# Altium PCB Copy of Final b.PcbDoc
Units mil, origin at the board's own origin, x right, y up, seen from the top; angles counter-clockwise.
Board outline 1791.34 x 1673.23 mil, 2 copper layers (Top Layer, Bottom Layer); 55 components, 36 nets, 187 pads, 190 vias.
Unrouted connection lines stored in the file: 61.
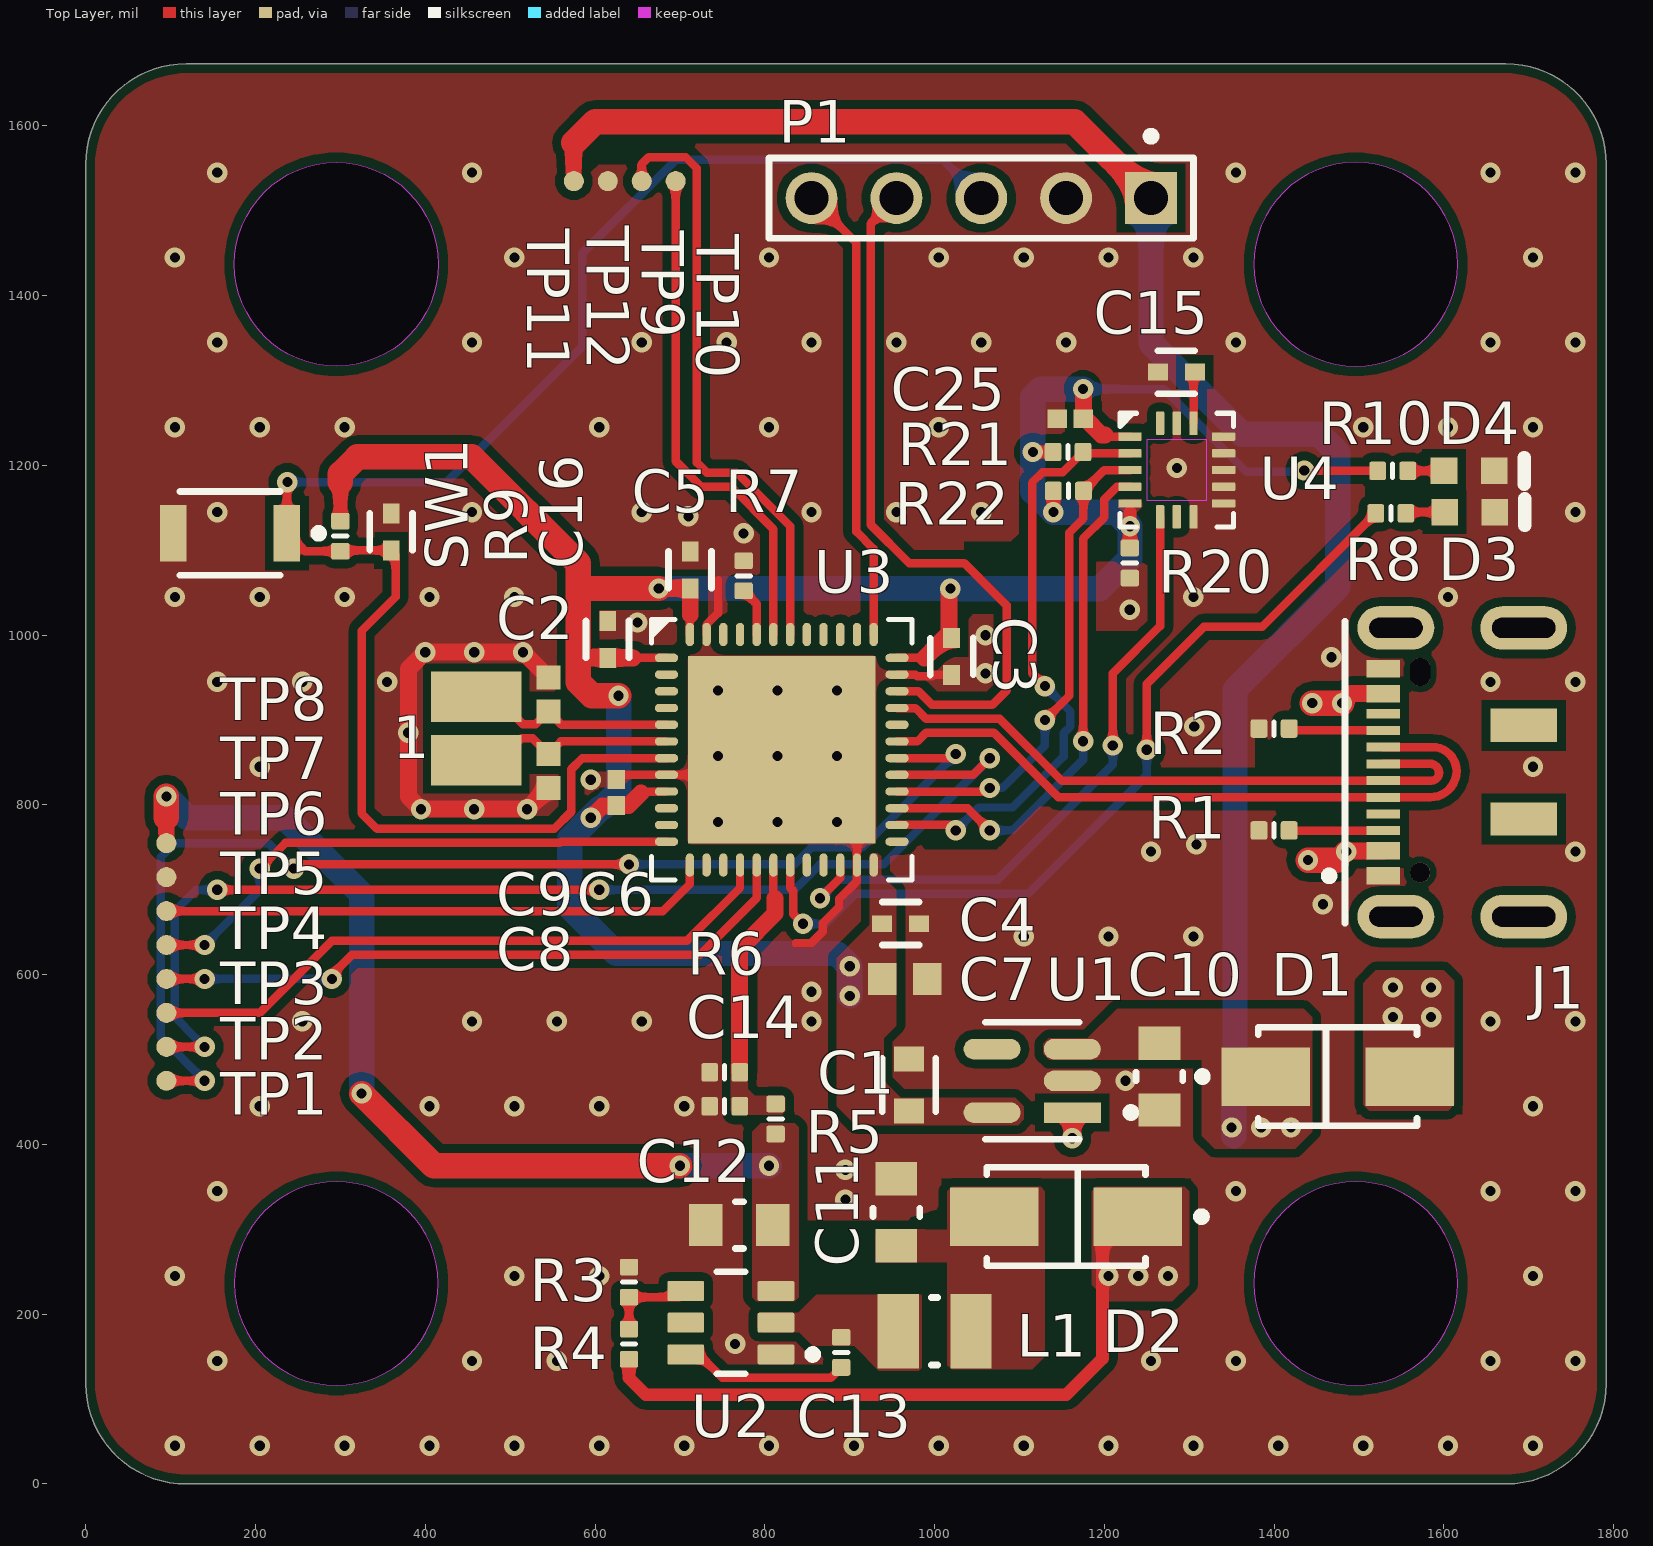
[diagram p0: Top Layer view]
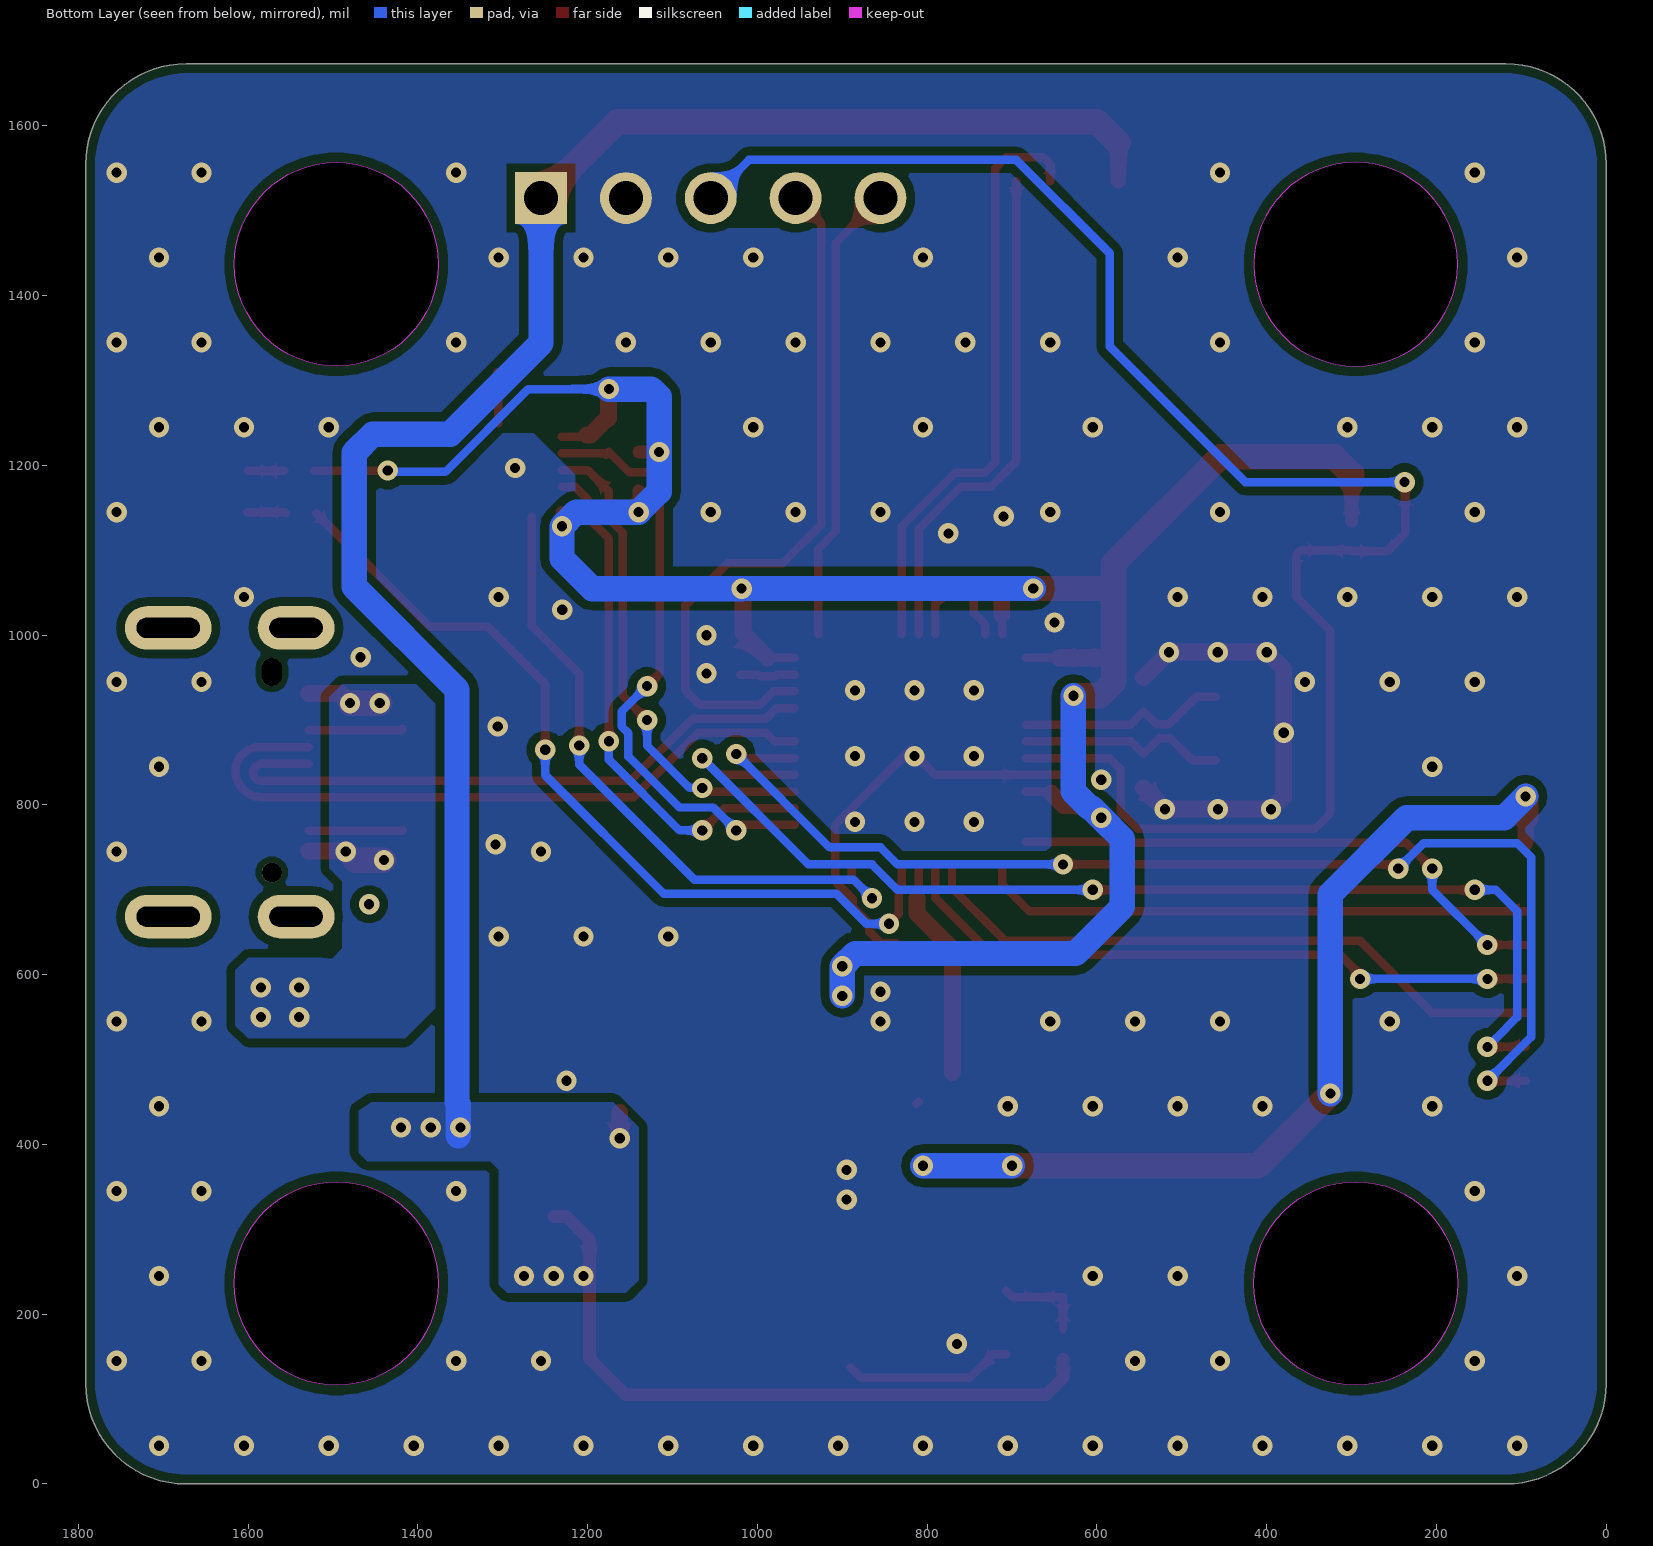
[diagram p1: Bottom Layer view, seen from below]

## Layer stack, top to bottom
Top Solder: solder mask 0.4, Solder Resist, Dk 3.5
Top Layer: signal copper 1.4
Dielectric 1: dielectric 12.6, FR-4, Dk 4.8
Bottom Layer: signal copper 1.4
Bottom Solder: solder mask 0.4, Solder Resist, Dk 3.5

## Board outline
0,118.11 ccw(c118.11,118.11) 118.11,0 1673.23,0 ccw(c1673.23,118.11) 1791.34,118.11 1791.34,1555.12 ccw(c1673.23,1555.12) 1673.23,1673.23 118.11,1673.23 ccw(c118.11,1555.12) 0,1555.12
cut-out: 1375.98,236.22 ccw(c1496.06,236.22) 1496.06,116.14 ccw(c1496.06,236.22) 1616.14,236.22 ccw(c1496.06,236.22) 1496.06,356.3 ccw(c1496.06,236.22)
cut-out: 1375.98,1437.01 ccw(c1496.06,1437.01) 1496.06,1316.93 ccw(c1496.06,1437.01) 1616.14,1437.01 ccw(c1496.06,1437.01) 1496.06,1557.09 ccw(c1496.06,1437.01)
cut-out: 295.28,1316.93 cw(c295.28,1437.01) 175.2,1437.01 cw(c295.28,1437.01) 295.28,1557.09 cw(c295.28,1437.01) 415.35,1437.01 cw(c295.28,1437.01)
cut-out: 175.2,236.22 ccw(c295.28,236.22) 295.28,116.14 ccw(c295.28,236.22) 415.35,236.22 ccw(c295.28,236.22) 295.28,356.3 ccw(c295.28,236.22)

## Design rules (kind name [scope] priority, off if disabled: settings)
BoardOutlineClearance [All] p1: gap=11.18 ignorepadtopadclearanceinfootprint=FALSE
Clearance MCU_ROOM [WithinRoom('ELRS_ROOM')OR WithinRoom('Motor_room')] p1: gap=10 ignorepadtopadclearanceinfootprint=FALSE except(0: Arc-SMDPad Arc-Text Track-SMDPad Track-Text SMDPad-SMDPad SMDPad-Text THPad-Text Via-Text Fill-Text Poly-Text Region-Text Text-Text; 6.5: Arc-Arc Arc-Track Track-Track)
Clearance [All] p2: gap=10 ignorepadtopadclearanceinfootprint=FALSE except(0: Arc-Text Track-Text SMDPad-Text THPad-Text Via-Text Fill-Text Poly-Text Region-Text Text-Text; 6: Arc-SMDPad Arc-THPad Arc-Via Track-SMDPad Track-THPad Track-Via SMDPad-SMDPad SMDPad-THPad SMDPad-Via THPad-THPad THPad-Via Via-Via; 6.5: Arc-Arc Arc-Track Track-Track; 6.9: Arc-Hole Track-Hole SMDPad-Hole THPad-Hole Via-Hole Fill-Hole Poly-Hole Region-Hole Text-Hole)
PlaneConnect [All] p1: planeconnectstyle=Direct reliefexpansion=20 reliefentries=4 reliefconductorwidth=10 reliefairgap=10
PolygonConnect [All] p1: connectstyle=Direct reliefconductorwidth=10 reliefentries=4 polygonreliefangle="90 Angle" airgapwidth=10
RoutingVias [All] p1: holewidth=12 width=24 viastyle="Through Hole" minholewidth=12 minwidth=24 maxholewidth=12 maxwidth=24
SolderMaskExpansion [IsVia] p1: expansion=0 istentingtop=TRUE
SolderMaskExpansion SolderMaskExpansion_1 [All] p2: expansion=4 istentingtop=FALSE
SupplyNets "Schematic Supply Nets_3" [InNet('6S LIPO VBAT')] p1: voltage=0.000
SupplyNets "Schematic Supply Nets_2" [InNet('+5')] p2: voltage=0.000
SupplyNets "Schematic Supply Nets_1" [InNet('+3.3')] p3: voltage=0.000
SupplyNets "Schematic Supply Nets" [InNet('GND')] p4: voltage=0.000
UnRoutedNet [All] p1: checkbadconnections=TRUE
Width [All] p1: maxlimit=30 minlimit=10 preferedwidth=10
28 further rules are at their usual default settings.

## Classes and differential pairs
component class "Copy of Final": 1 C1 C2 C3 C4 C5 C6 C7 C8 C9 C10 C11 C12 C13 C14 C15 C16 C25 D1 D2 D3 D4 J1 P1 R1 R4 R5 R6 R7 R8 R9 R10 R20 R21 R22 SW1 TP1 TP2 TP3 TP4 TP5 TP6 TP7 TP8 TP9 TP10 TP11 TP12 U1 U2 U3 U4

## Components (designator, comment, footprint, x,y, rotation, side; value= is the part's Value field where it differs from the comment)
1 "NX3225GD-8MHZ-STD-CRA-3" NDK-NX3225GD-8MHZ-STD-CRA-3_V 460,890.08 r270 top
C1 "4.7uF" FP-GRM188-0_15-MFG 970,470 r90 top
C2 "100nF" FP-0402YC104KAT2A-MFG 615,995 r90 top
C3 "100nF" FP-0402YC104KAT2A-MFG 1020,975 r270 top
C4 "100nF" FP-0402YC104KAT2A-MFG 960,660 r0 top
C5 "100nF" FP-0402YC104KAT2A-MFG 712.17,1076.89 r90 top
C6 "10nF" CAPC1005X55X25LL05T10 625,814.65 r90 top
C7 "1uF" CAPC1608X90X35NL10T15 965,595 r180 top
C8 "Capacitor 10 pF +/- 5% 50 V 0402" CAPC1005X55X25ML05T05 545,840.08 r270 top value=10pF
C9 "Capacitor 10 pF +/- 5% 50 V 0402" CAPC1005X55X25ML05T05 545,930.08 r90 top value=10pF
C10 "10µF" FP-0805-L_2_0_0_15-W_1_25-MFG 1265,480 r270 top
C11 "10µF" FP-0805-L_2_0_0_15-W_1_25-MFG 955,320 r270 top
C12 "10µF" FP-0805-L_2_0_0_15-W_1_25-MFG 770,305 r180 top
C13 "Capacitor 100nF +/-20% 50V 0402" CAPC0402(1005)60_L 890,155 r270 top value=100nF
C14 "Capacitor 100nF +/-20% 50V 0402" CAPC0402(1005)60_L 752.72,445 r180 top value=100nF
C15 "100nF" FP-0402YC104KAT2A-MFG 1285,1310 r180 top
C16 "100nF" FP-0402YC104KAT2A-MFG 360,1121.65 r90 top
C25 "Capacitor 0.1 uF +/- 5% 16 V 0402" CAPC1005X56X25LL10T15 1160,1255 r180 top value=100nF
D1 "SS14" FP-403AE-MFG 1475,480 r180 top
D2 "SS14" FP-403AE-MFG 1155,315 r0 top
D3 "HSMR-C190" AVAG-HSMX-C190_V 1630.47,1145 r0 top
D4 "HSMR-C190" AVAG-HSMX-C190_V 1629.8,1193.62 r0 top
J1 "DX07S016JA3R1500" FP-DX07S016JA3R1500-MFG 1648.9,838.54 r90 top
L1 "MLP2520S100MT0S1 TDK" INDC2520X100X60NL20T20 1000,180 r0 top
P1 "77311-462K05LF" FCI-77311-5_V 1055,1515 r180 top
R1 "Resistor 2K37 +/-1 % 0402 63 mW" RESC0402(1005)_L 1400,770 r0 top value=5.1K
R2 "Resistor 2K37 +/-1 % 0402 63 mW" RESC0402(1005)_L 1400,890 r180 top value=5.1K
R3 "Resistor 2K37 +/-1 % 0402 63 mW" RESC0402(1005)_L 640,237.72 r90 top value=13..3K
R4 "100KR2F" RESC0402(1005)_L 640,164.68 r90 top
R5 "Resistor 2K37 +/-1 % 0402 63 mW" RESC0402(1005)_L 812.72,430 r270 top value=68K
R6 "Resistor 2K37 +/-1 % 0402 63 mW" RESC0402(1005)_L 752.72,485 r0 top value=10K
R7 "Resistor 2K37 +/-1 % 0402 63 mW" RESC0402(1005)_L 775,1070 r270 top value=10K
R8 "Resistor 2K37 +/-1 % 0402 63 mW" RESC0402(1005)_L 1537.56,1143.62 r0 top value=330
R9 "Resistor 2K37 +/-1 % 0402 63 mW" RESC0402(1005)_L 300,1116.65 r90 top value=10K
R10 "Resistor 2K37 +/-1 % 0402 63 mW" RESC0402(1005)_L 1539.8,1193.62 r0 top value=1K
R20 "Resistor 2K37 +/-1 % 0402 63 mW" RESC0402(1005)_L 1230,1085 r90 top value=10K
R21 "Resistor 2K37 +/-1 % 0402 63 mW" RESC0402(1005)_L 1157.21,1215.86 r0 top value=10K
R22 "Resistor 2K37 +/-1 % 0402 63 mW" RESC0402(1005)_L 1157.72,1170 r0 top value=10K
SW1 "B3U-1000P" OMRON-B3U-1000_V 170,1120 r180 top
TP1 "TPAD6R" TP06R 95,475 r180 top
TP2 "TPAD6R" TP06R 95,515 r180 top
TP3 "TPAD6R" TP06R 95,555 r180 top
TP4 "TPAD6R" TP06R 95,595 r180 top
TP5 "TPAD6R" TP06R 95,635 r180 top
TP6 "TPAD6R" TP06R 95,675 r180 top
TP7 "TPAD6R" TP06R 95,715 r180 top
TP8 "TPAD6R" TP06R 95,755 r180 top
TP9 "TPAD6R" TP06R 655,1535 r180 top
TP10 "TPAD6R" TP06R 695,1535 r180 top
TP11 "TPAD6R" TP06R 575,1535 r270 top
TP12 "TPAD6R" TP06R 615,1535 r270 top
U1 "AP2112K-3.3TRG1" FP-SOT25-IPC_A 1115,475 r180 top
U2 "TPS54302DDCR" FP-DDC0006A-MFG 760,190 r180 top
U3 "STM32L452CEU6" STM-UFQFPN48_N 820,865 r0 top
U4 "ICM-20602" INSE-I62-16 1285.43,1194.57 r0 top

## Footprints (in the part's own frame and the unit in brackets; to place one, negate y for a bottom-side part, rotate by r counter-clockwise, add the part's x,y. Pads: shape width x height; smd on the part's side, far side on the other; paste and mask are expansions set on the pad)
AVAG-HSMX-C190_V [mm] "SMD, 2-Leads, Body 1.6x0.8mm, Height 0.9mm"
  rect 0.8x0.8 smd: 1(-0.75,0) 2(0.75,0)
  silkscreen extent 1.65,-0.4 1.65,0.4, body extent -0.8,-0.4 0.8,0.4, height 0.9
CAPC0402(1005)60_L [mm] "Chip Capacitor, Body 1.0x0.5mm, Height 0.6mm, IPC High Density"
  rrect25% 0.5x0.55 smd: 1(-0.45,0) 2(0.45,0)
  silkscreen extent 0,-0.2 0,0.2, body extent -0.5,-0.25 0.5,0.25, height 0.6
CAPC1005X55X25LL05T10 [mm] "Chip Capacitor, 2-Leads, Body 1.05x0.55mm, IPC High Density"
  rect 0.56x0.52 smd: 1(-0.39,0) 2(0.39,0)
  body extent -0.53,-0.28 0.53,0.28, height 0.55
CAPC1005X55X25ML05T05 [mm] "Chip Capacitor, 2-Leads, Body 1.05x0.55mm, IPC Low Density"
  rect 0.72x0.72 smd: 1(-0.51,0) 2(0.51,0)
  body extent -0.53,-0.28 0.53,0.28, height 0.55
CAPC1005X56X25LL10T15 [mm] "Chip Capacitor, 2-Leads, Body 1.10x0.60mm, IPC High Density"
  rect 0.58x0.54 smd: 1(-0.39,0) 2(0.39,0)
  body extent -0.55,-0.3 0.55,0.3, height 0.56
CAPC1608X90X35NL10T15 [mm] "Chip Capacitor, 2-Leads, Body 1.60x0.80mm, IPC Medium Density"
  rect 0.85x0.95 smd: 1(-0.675,0) 2(0.675,0)
  body extent -0.85,-0.45 0.85,0.45, height 0.9
FCI-77311-5_V [mm] "THD, 5-Leads, Body 12.7x2.4mm, Pitch 2.54mm"
  rect 1.55x1.55 hole 1.02: 1(-5.08,0)
  round 1.55 hole 1.02: 2(-2.54,0) 3(0,0) 4(2.54,0) 5(5.08,0)
  silkscreen extent -6.35,-1.97 6.35,1.2, body extent -6.35,-1.2 6.35,1.2, height 16.24
FP-0402YC104KAT2A-MFG [mm]
  rect 0.6x0.5 smd paste+0 mask+0: 1(-0.55,0) 2(0.55,0)
  silkscreen extent -0.55,-0.64 0.56,0.65, body extent -0.95,-0.4 0.95,0.4, height 0.25
FP-403AE-MFG [mm]
  rect 2.65x1.75 smd paste+0 mask+0: 1(-2.15,0) 2(2.15,0)
  silkscreen extent -2.37,-1.48 4.17,1.48, body extent -3.57,-1.58 3.57,1.58, height 0.25
FP-0805-L_2_0_0_15-W_1_25-MFG [mm]
  rect 1x1.25 smd paste+0 mask+0: 1(-1,0) 2(1,0)
  silkscreen extent -0.13,-0.7 0.13,0.7, body extent -1.6,-0.8 1.6,0.8, height 0.25
FP-DDC0006A-MFG [mm]
  rrect17% 1.1x0.6 smd paste+0 mask+0: 1(-1.35,0.95) 2(-1.35,0) 3(-1.35,-0.95) 4(1.35,-0.95) 5(1.35,0) 6(1.35,0.95)
  silkscreen extent -2.58,-1.53 0.43,1.53, body extent -2,-1.63 2,1.63, height 0.25
FP-DX07S016JA3R1500-MFG [mm]
  rrect100% 1.3x2.3 hole 1.6 slot 0.6 at 0 deg paste-2539.97 mask+0: 1(-4.32,2.675) 2(4.32,2.675)
  rrect100% 1.3x2.6 hole 1.9 slot 0.6 at 0 deg paste-2539.97 mask+0: 3(-4.32,-1.15) 6(4.32,-1.15)
  rect 1x2 smd paste+0 mask+0: 4(-1.4,-1.15) 5(1.4,-1.15)
  rect 0.52x1 smd paste+0 mask+0: A1/B12(-3.1,3.05) A4/B9(-2.35,3.05) A12/B1(3.1,3.05) B4/A9(2.35,3.05)
  rect 0.27x1 smd paste+0 mask+0: A5(-1.75,3.05) A6(-0.25,3.05) A7(0.75,3.05) A8(1.75,3.05) B5(1.25,3.05) B6(0.25,3.05) B7(-0.75,3.05) B8(-1.25,3.05)
  round 0.6 hole 0.6 unplated paste-2539.97 mask+0: ""(-3,1.95)
  rrect100% 0.85x0.6 hole 0.6 slot 0.85 at 0 deg unplated paste-2539.97 mask+0: ""(3,1.95)
  silkscreen extent -4.52,4.2 4.52,4.8, body extent -5.07,-3.9 5.07,3.92, height 0.25
FP-GRM188-0_15-MFG [mm]
  rect 0.75x0.9 smd paste+0 mask+0: 1(-0.775,0) 2(0.775,0)
  silkscreen extent -0.8,-0.8 0.8,0.8, body extent -1.25,-0.58 1.25,0.58, height 0.25
FP-SOT25-IPC_A [mm]
  rect 1.707x0.616 smd paste+0 mask+0: 1(-1.201,0.95)
  rrect100% 1.707x0.616 smd paste+0 mask+0: 2(-1.201,0) 3(-1.201,-0.95) 4(1.201,-0.95) 5(1.201,0.95)
  silkscreen extent -3.08,-1.75 1.4,1.75, body extent -2.55,-2 2.55,2, height 0.25
INDC2520X100X60NL20T20 [mm] "Chip Inductor, 2-Leads, Body 2.7x2.2mm, IPC Medium Density"
  rect 1.23x2.22 smd: 1(-1.085,0) 2(1.085,0)
  silkscreen extent -0.1,-1.01 0.1,1.01, body extent -1.35,-1.1 1.35,1.1, height 1
INSE-I62-16 [mm] "LGA, 16-Leads, Body 3x3mm, Pitch 0.5mm"
  rrect25% 0.7x0.25 smd: 1(-1.4,1) 2(-1.4,0.5) 3(-1.4,0) 4(-1.4,-0.5) 5(-1.4,-1) 9(1.4,-1) 10(1.4,-0.5) 11(1.4,0) 12(1.4,0.5) 13(1.4,1)
  rrect25% 0.25x0.7 smd: 6(-0.5,-1.4) 7(0,-1.4) 8(0.5,-1.4) 14(0.5,1.4) 15(0,1.4) 16(-0.5,1.4)
  Top Layer keep-out region: -0.9,-0.9 0.9,-0.9 0.9,0.9 -0.9,0.9
  silkscreen extent -1.7,-1.7 1.7,1.7, body extent -1.5,-1.5 1.5,1.5, height 0.75
NDK-NX3225GD-8MHZ-STD-CRA-3_V [mm] "SMD, 2-Leads, Body 3.2x2.5mm"
  rect 1.5x2.7 smd: 1(-0.95,0) 2(0.95,0)
  body extent -1.6,-1.25 1.6,1.25, height 1
OMRON-B3U-1000_V [mm] "SMD, 2-Leads, Body 3x2.5mm"
  rect 0.8x1.7 smd: 1(-1.7,0) 2(1.7,0)
  silkscreen extent -2.78,-1.25 1.5,1.25, body extent -1.5,-1.25 1.5,1.25, height 1.75
RESC0402(1005)_L [mm] "Chip Resistor, Body 1.0x0.5mm, IPC High Density"
  rrect25% 0.5x0.55 smd: 1(-0.45,0) 2(0.45,0)
  silkscreen extent 0,-0.2 0,0.2, body extent -0.5,-0.25 0.5,0.25, height 0.3
STM-UFQFPN48_N [mm]
  oval 0.7x0.25 smd: 1(-3.45,2.75) 2(-3.45,2.25) 3(-3.45,1.75) 4(-3.45,1.25) 5(-3.45,0.75) 6(-3.45,0.25) 7(-3.45,-0.25) 8(-3.45,-0.75) 9(-3.45,-1.25) 10(-3.45,-1.75) 11(-3.45,-2.25) 12(-3.45,-2.75) 25(3.45,-2.75) 26(3.45,-2.25) 27(3.45,-1.75) 28(3.45,-1.25) 29(3.45,-0.75) 30(3.45,-0.25) 31(3.45,0.25) 32(3.45,0.75) 33(3.45,1.25) 34(3.45,1.75) 35(3.45,2.25) 36(3.45,2.75)
  oval 0.25x0.7 smd: 13(-2.75,-3.45) 14(-2.25,-3.45) 15(-1.75,-3.45) 16(-1.25,-3.45) 17(-0.75,-3.45) 18(-0.25,-3.45) 19(0.25,-3.45) 20(0.75,-3.45) 21(1.25,-3.45) 22(1.75,-3.45) 23(2.25,-3.45) 24(2.75,-3.45) 37(2.75,3.45) 38(2.25,3.45) 39(1.75,3.45) 40(1.25,3.45) 41(0.75,3.45) 42(0.25,3.45) 43(-0.25,3.45) 44(-0.75,3.45) 45(-1.25,3.45) 46(-1.75,3.45) 47(-2.25,3.45) 48(-2.75,3.45)
  rect 5.6x5.6 smd paste-3: 49(0,0)
  silkscreen extent -3.9,-3.9 3.9,3.9, body extent -3.5,-3.5 3.5,3.5, height 0.55
TP06R [mm] "Testpoint, round, d=0.6mm"
  round 0.6 smd paste-1: 1(0,0)

## Part data
1: library part CMP-2000-07595-1, "Crystal Unit, 8 MHz, 8 pF, -40 to 150 degC, 2-Pin SMD, RoHS, Tape and Reel", Case/Package=SMD/SMT, ESR (Equivalent Series Resistance)=500Ohm, Frequency=8MHz, Frequency Stability=150ppm, Frequency Tolerance=50ppm, Load Capacitance=8pF, Manufacturer=NDK, Max Operating Temperature=150degC, Min Operating Temperature=-40degC, Package Description="2-Pin Surface Mount Device, Body 3.2 x 2.5 mm", Package Quantity=3000, Datasheet URL=http://www.ndk.com/images/products/catalog/c_NX3225GD-STD-CRA-3_e.pdf, Datasheet Version=11/2016, Height=0.039inch, Length=0.126inch, Manufacturer URL=http://www.ndk.com/en/, Mount=SurfaceMount, Mounting Technology=SurfaceMount, Number of Pins=2, Package Reference=NX3225GD-8MHZ-STD-CRA-3, Packaging=TapeandReel, RoHSCompliant=True, Width=0.098inch
C1: library part CMP-06035-062935-2, "CAP CER 4.7UF 16V X5R 0603", Capacitance=4.7µF, Case Code (Imperial)=0603, Case Code (Metric)=1608, Dielectric=X5R, Max Operating Temperature=85°C, Min Operating Temperature=-55°C, Tolerance=10%, Voltage Rating=16V, Case/Package=0603, Depth=800µm, Height=800µm, Lead Free="Lead Free", Length=1.6mm, Lifecycle Status=Production, Material=Ceramic, Mount="Surface Mount", NexarPartId=20311162, Packaging="Tape & Reel (TR)", REACH SVHC="No SVHC", RoHS=Compliant, Schedule B=8532240020, Termination=SMD/SMT, Thickness=939.8µm, Voltage Rating (DC)=16V, Weight=6.293594mg, Width=800µm
C2 C3 C4 C5 C15 C16: library part CMP-2008-02800-2, Case Code (Imperial)=0402, Case Code (Metric)=1005, Dielectric=X7R, Dielectric Material=Ceramic, Max Operating Temperature=125°C, Min Operating Temperature=-55°C, Tolerance=10%, Voltage=16V, Capacitance=100nF, Case/Package=0402, Contact Plating=Tin, Depth=500µm, Height=560µm, Lead Free="Lead Free", Length=1mm, Lifecycle Status=Production, Material=Ceramic, Mount="PCB, Surface Mount", NexarPartId=71036144, Number of Pins=2, Packaging="Cut Tape", Radiation Hardening=No, REACH SVHC=Unknown, RoHS=Compliant, Schedule B=8532240020, Termination=SMD/SMT, Thickness=558.8µm, Voltage Rating=16V, Voltage Rating (DC)=16V, Width=508µm
C6: library part CMP-2000-06332-1, "Chip Capacitor, 10 nF, 16 V, 10%, -55 to 125 degC, 0402 (1005 Metric), RoHS, Tape and Reel", Capacitance=10000pF, Case Size/Dimension=0402, Dielectric=X7R, Manufacturer=Murata, Package Description="2-Pin Surface Mount Device, Body 1 x 0.5 mm", Rated Voltage=16V, Tolerance (%)=±10%, Datasheet URL=http://psearch.en.murata.com/capacitor/product/GRM155R71C103KA01%23.pdf, Datasheet Version=06/2016, Manufacturer URL=http://www.murata.com/, Mounting Technology=SurfaceMount, Package Reference=0402
C7: library part CMP-2006-02812-1, Manufacturer=Murata, Part Number=GRM188R61C105KA12D
C8 C9: library part CMP-001-00013-6, "Chip Capacitor, 10 pF, +/- 5%, 50 V, 0402 (1005 Metric)", Capacitor Type=Ceramic, Case/Package=0402, Max Operating Temperature=125°C, Min Operating Temperature=-55°C, Tolerance=5%, Voltage Rating=50V, Mounting Technology=SM, Pins=2, RoHS Compliant=True
C10 C11 C12: library part CMP-14477-004998-2, "Multilayer Ceramic Capacitor 10 uF 16V X5R 10% SMD 0805 T/R", Capacitance=10uF, Case/Package=0805, Dielectric=X5R, Max Operating Temperature=85°C, Min Operating Temperature=-55°C, Tolerance=10%, Voltage Rating=16V, Contact Plating=Tin, Length=0.079inch, Mount="Surface Mount", Packaging="Tape and Reel", RoHS Compliant=Yes, Termination=Wraparound, Thickness=0.053inch, Width=0.049inch
C13 C14: library part CMP-001-00067-3, "Chip Capacitor, 100nF +/-20%, 50V, 0402, Thickness 0.6 mm", Case/Package=0402, Max Operating Temperature=85°C, Min Operating Temperature=-55°C, Tolerance=10%, Voltage Rating=50V, Mounting Technology=SMT, Pins=2
C25: library part CMP-001-00001-6, "Chip Capacitor, 0.1 uF, +/- 5%, 16 V, 0402 (1005 Metric)", Capacitor Type=Ceramic, Case/Package=0402, Max Operating Temperature=125°C, Min Operating Temperature=-55°C, Tolerance=5%, Voltage Rating=16V, Mounting Technology=SM, Pins=2, RoHS Compliant=True
D1 D2: library part CMP-2000-04943-2, "DIODE SCHOTTKY 40V 1A SMA", Forward Current=1A, Manufacturer="ON Semiconductor", Max Junction Temp=+125°C, Max Repetitive Reverse Voltage=40V, Max Surge Forward Current=40A, Package=403AE, Peak Reverse Current=0.2mA, Temperature="-65°C to +125°C", Temperature Range Low=-65°C, Automotive=No, Category=Diode, ComponentLink2Description=Datasheet, ComponentLink2URL=https://www.onsemi.com/pub/Collateral/SS19-D.PDF, Device Class L1="Discrete Semiconductors", Device Class L2=Diodes, Device Class L3="Schottky Diodes", Digikey Description="DIODE SCHOTTKY 40V 1A SMA", Height=2.5mm, Lead Free=Yes, Manufacturer Part Number=SS14, Mouser Description="Schottky Diodes & Rectifiers SMA 40V 1.0A", Octopart=https://octopart.com/ss14-on+semiconductor-29205033, RoHS=TRUE, Standoff Height=0.05mm, Temperature Range High=+125°C
D3 D4: library part CMP-007-00015-2, "LED Uni-Color Blue, 78 mW, 20 mA, -40 to 85 degC, 2-Pin SMD, RoHS, Tape and Reel", Case/Package=0603, Colour=Blue, Forward Current=20mA, Forward Voltage=3.4V, Manufacturer=Avago, Max Operating Temperature=85°C, Min Operating Temperature=-40°C, Package Description="2-Pin Surface Mount Device, Body 1.6 x 0.8 mm, Height 0.9 mm", Package Quantity=4000, Package Reference=HSMX-C190, Power=78mW, Datasheet URL=http://docs.avagotech.com/docs/AV02-0977EN, Datasheet Version=Apr-10, Illumination Colour=Blue, Lens Style=Diffused, Luminous Intensity=55mcd, Manufacturer URL=http://www.avagotech.com/, Mounting Technology=SM, Nominal Vf=3.4V, Packaging=TapeandReel, Pins=2, RoHS Compliant=True, Viewing Angle=155degrees
J1: library part CMP-19038-000002-1, "CONN RCP USB2.0 TYP C 24P SMD RA"
L1: library part CMP-08253-000118-1, "Shielded Multilayer Inductor 10uH ±20% 700mA 364mΩ SMD 1008", Case Code (Imperial)=1008, Case Code (Metric)=2520, Current Rating=700mA, DC Resistance (DCR)=364mR, Inductance=10uH, Max Operating Temperature=125°C, Min Operating Temperature=-40°C, Package Quantity=3000, Test Frequency=2MHz, Tolerance=20%, Case/Package=1008, Core Material=Ferrite, Height - Seated (Max)=0.047inch, Length=0.098inch, Mount="Surface Mount", Packaging="Tape and Reel", RoHS Compliant=Yes, Shielding=Shielded, Width=0.079inch
P1: library part CMP-002-00021-2, "Male Header, Pitch 2.54 mm, 1 x 5 Position, Height 16.24 mm, Tail Length 3.05 mm, -65 to 125 degC, RoHS, Tape and Reel", Case/Package=77311-5, Manufacturer="FCI Electronics", Package Description="Male Header, Pitch 2.54 mm, 1 x 5 Position, Height 16.24 mm, Tail Length 3.05 mm", Connector Type=Header, Datasheet URL=http://portal.fciconnect.com/Comergent//fci/drawing/77311.pdf, Datasheet Version="Rev. CK, 07/2016", Gender=Male, Manufacturer URL=http://portal.fciconnect.com/, Mounting Technology=TH, Package Reference=77311-5, RoHS Compliant=Unknown
R1 R2: library part CMP-1011-00590-4, "RES Thick Film, 5.1kΩ, 1%, 0.063W, 100ppm/°C, 0402", Case/Package=0402, Max Operating Temperature=155°C, Min Operating Temperature=-55°C, Power=63mW, Tolerance=1%, Pins=2
R3: library part CMP-2002-08200-1, Case/Package=0402, Max Operating Temperature=155°C, Min Operating Temperature=-55°C, Power=63mW, Tolerance=1%, Pins=2
R4: library part CMP-08839-005529-1, "Thick Film Chip Resistor, 0402, 100kΩ, 1%, 100ppm/°C, 0.063W, 50V", Case Code (Imperial)=0402, Case Code (Metric)=1005, Max Operating Temperature=155°C, Max Power Dissipation=63mW, Min Operating Temperature=-55°C, Package Quantity=10000, Resistance=100kR, Resistor Type="Thick Film", Temperature Coefficient=400ppm/°C, Tolerance=1%, Voltage Rating (DC)=50V, Case/Package=0402, Construction=Rectangular, Depth=0.5mm, Features="Automotive AEC-Q200", Height=0.016inch, Lead Free="Lead Free", Length=0.039inch, Military Standard=Not, Number of Terminations=2, Packaging="Tape and Reel", Power Rating=63mW, RoHS Compliant=Yes, Series=MCR01, Size Code=0402, Width=0.02inch
R5: library part CMP-2002-00170-1, Case/Package=0402, Max Operating Temperature=155°C, Min Operating Temperature=-55°C, Power=63mW, Tolerance=1%, Pins=2
R6 R7 R9 R20 R21 R22: library part CMP-2002-03043-1, Case/Package=0402, Max Operating Temperature=155°C, Min Operating Temperature=-55°C, Power=63mW, Tolerance=1%, Pins=2
R8 R10: library part CMP-1011-00429-3, "RES Thick Film, 200Ω, 1%, 0.063W, 100ppm/°C, 0402", Case/Package=0402, Max Operating Temperature=155°C, Min Operating Temperature=-55°C, Power=63mW, Tolerance=1%, Pins=2
SW1: library part CMP-011-00000-2, "Tactile Switch, SPST-NO, 0.05 A, 12 V, -25 to 70 degC, 2-Pin SMD, RoHS, Tape and Reel", Case/Package=B3U-1000, Contact Current Rating=50mA, IP Rating=IP40, Manufacturer="Omron Electronic Components", Max Contact Resistance=100mohm, Max Operating Temperature=70°C, Max Voltage Rating (DC)=12V, Min Operating Temperature=-25°C, Operating Force=153gf, Package Description="2-Pin Surface Mount Device, Body 3 x 2.5 mm", Package Quantity=3500, Resistance=0.1Ohm, Contact Material=Silver, Current Rating=50mA, Datasheet URL=http://www.omron.com/ecb/products/pdf/en-b3u.pdf, Datasheet Version=Jan-15, Manufacturer URL=http://www.omron.com/, Max Current Rating=50mA, Mounting Technology=SM, Package Reference=B3U-1000, Packaging=TapeandReel, RoHS Compliant=True, Throw Configuration=SPST, Voltage Rating=12V, Voltage Rating (DC)=12V
TP1 TP2 TP3 TP4 TP5 TP6 TP7 TP8 TP9 TP10 TP11 TP12: library part CMP-00028-00002-2, "0.6mm round", Pins=1
U1: library part CMP-12756-000035-1, "IC REG LINEAR 3.3V 600MA SOT25", Case/Package=SOT-23-5, Dropout Voltage=250mV, Max Input Voltage=6V, Max Operating Temperature=85°C, Max Output Current=600mA, Min Input Voltage=2.5V, Min Operating Temperature=-40°C, Output Voltage=3.3V, Package Quantity=1, Quiescent Current=55uA, Accuracy=1.5%, Height=1.3mm, Lead Free="Lead Free", Length=3.1mm, Mount="Surface Mount", Number of Outputs=1, Number of Pins=5, Number of Regulators=1, Output Current=600mA, Output Type=Fixed, Packaging="Tape and Reel", Polarity=Positive, Width=1.7mm
U2: library part CMP-04918-000032-1, "IC REG BUCK ADJ 3A TSOT23-6", Manufacturer="Texas Instruments", Max Junction Temp=+125°C, Max Supply Voltage=28V, Min Supply Voltage=4.5V, Nominal Supply Current=45uA, Output Current=3A, Output Voltage=0.6-26V, Package=DDC0006A, Switching Frequency=400kHz, Temperature="-40°C to +125°C", Temperature Range Low=-40°C, Automotive=No, Category=IC, ComponentLink2Description=Datasheet, ComponentLink2URL=http://www.ti.com/lit/ds/symlink/tps54302.pdf, Device Class L1="Integrated Circuits (ICs)", Device Class L2="Power Management ICs", Device Class L3="Voltage Regulators - Switching", Digikey Description="IC REG BUCK ADJ 3A TSOT23-6", Height=1.1mm, Ipc Land Pattern Name=SOT95P280X110-6, Lead Free=Yes, Manufacturer Part Number=TPS54302DDCR, Max Duty Cycle=100%, Number of Outputs=1, Octopart=https://octopart.com/tps54302ddcr-texas+instruments-74209025, Output Type=AdjustableProgrammable, RoHS=TRUE, Standoff Height=0mm, Switching Topology=Buck, Temperature Range High=+125°C
U3: library part CMP-020-00022-3, "ARM® Cortex®-M4 STM32L4 Microcontroller IC 32-Bit 80MHz 512KB (512K x 8) FLASH 48-UFQFPN (7x7)", Case/Package=UFQFN-48, Min Supply Voltage=2V, ComponentLink1Description="Manufacturer URL", ComponentLink1URL=http://www.st.com/, ComponentLink2Description=Datasheet, ComponentLink2URL=http://www.st.com/st-web-ui/static/active/en/resource/technical/document/datasheet/CD00161566.pdf, I/Os=38, Mounting Technology="Surface Mount", Pins=49, RAM Size=160, RoHS Compliant=Yes
U4: library part CMP-010-00023-3, "High Performance 6-Axis MEMS MotionTracking(TM) Device, 1.71 to 3.45 V, -40 to 85 degC, 16-Pin LGA, RoHS", Case/Package=LGA-16, Max Operating Temperature=85°C, Max Supply Voltage=3.45V, Min Operating Temperature=-40°C, Min Supply Voltage=1.71V, Mounting Technology=SMT, Pins=16, RoHS Compliant=Yes, Sensor Type="6 Axis,Accelerometer,Gyroscope,Temperature"

## Via types
v1: diameter 24, hole 12, Top Layer to Bottom Layer, tented both sides, 190 vias

## Nets (pads, with @x,y where several pads share a name; then routed paths per layer and width w, separated by ;. In a path a pad name is that pad's centre, name@x,y a point inside that pad or via, vN(x,y) a via of type N, cw(c..) or ccw(c..) an arc to the next point about the centre after c; other vN are vias at no path point)
"6S LIPO VBAT": C12.1 R5.2 TP8.1 U2.3 | length 1092.8
  Top Layer w18: TP8.1 95,795
  Top Layer w30: 95,785 v1(95,810) ; v1(325,460) 410,375 v1(700,375)
  Bottom Layer w30: v1(95,810) 115,790 120,785 130,785 235,785 325,695 v1(325,460) ; v1(700,375) v1(805,375)
+3.3: C1.1 C2.1 C3.1 C4.1 C5.1 C6.1 C7.2 C25.1 R9.2 R10.1 R20.2 R21.1 R22.1 U1.5 U3.1 U3.9 U3.24 U3.36 U3.48 U4.1 U4.5 | length 3282.9
  Top Layer w10: 645,973.27 U3.1 ; 653.97,815.79 U3.9 ; U3.48 711.73,1023.27 ; U3.36 988.27,973.27 ; 1201.06,1233.94 U4.1 ; v1(1435.5,1194) 1435.88,1193.62 R10.1
  Top Layer w15: R9.2 300,1180 ; v1(1115.86,1215.86) R21.1 ; v1(1140,1145) R22.1 ; R20.2 1230.31,1103.03 1230.31,1145
  Top Layer w20: 580,973.2 580.14,973.35 644.92,973.35 645,973.27 ; v1(595,785) 608.59,798.59 C6.1@624.3,798.59 ; C6.1 639.29,799.29 653.97,813.97 ; v1(675,1055) 675.24,1055.24 C5.1 712.17,1023.7 ; 988.27,973.27 1016.81,1001.81 v1@1016.81,1054.85 ; v1@1016.84,1054.88 v1(1018.71,1054.88) ; v1(1175,1290) 1175.35,1289.65 C25.1 1177.64,1255 1196.89,1235.75 1201.06,1235.75
  Top Layer w30: 300,1180 300,1190 320,1210 455,1210 580.17,1084.83 580.17,1040 ; 580,973.2 580.17,973.03 580.17,944.83 596.26,928.74 v1(627.67,928.74) ; 580.17,973.35 580.17,1040 ; v1(675,1055) 580.17,1055 580.17,1040
  Bottom Layer w10: v1(1175,1290) 1270,1290 1367.56,1192.44 1433.94,1192.44 v1(1435.5,1194)
  Bottom Layer w30: v1(627.67,928.74) 628,928.41 628,815.98 608.67,796.65 606.65,796.65 v1(595,785) 570,760 570,680 625,625 885,625 v1(900,610) v1(900,575) ; v1(675,1055) 1018.59,1055 v1(1018.71,1054.88) 1194.88,1054.88 1230.28,1090.28 v1(1230.28,1128.39) 1213.67,1145 v1(1140,1145) 1115.86,1169.14 v1(1115.86,1215.86) 1115.86,1280.86 1125,1290 v1(1175,1290)
+5: C10.1 D1.2 D2.2 P1.1 R4.1 TP11.1 U1.1 U1.3 | length 2901.5
  Top Layer w15: R4.1 640,125 660,105 1155,105 1197.79,147.79 1197.79,287.79 1225,315 D2.2
  Top Layer w18: TP11.1 575,1580
  Top Layer w20: v1(1162.27,407.27) U1.1
  Top Layer w30: 575,1580 600,1605 1165,1605 P1.1
  Bottom Layer w30: P1.1 1255,1344 1362,1237 1453,1237 1475,1215 1475,1057 1354,936 1354,449 1352.5,447.5 v1@1352.5,410.5
  other v1: 1205,245 1240,245 1275,245 1350,420 1385,420 1420,420
"Drone CR": TP6.1 U3.13 | length 652.3
  Top Layer w10: TP6.1 130,675 680,675 711.73,706.73 U3.13
"Drone TX": TP5.1 U3.12 | length 654.2
  Top Layer w10: TP5.1 v1(140,635) ; v1(205,725) 235.2,755.2 558.54,755.2 560.07,756.73 U3.12
  Bottom Layer w10: v1(140,635) 205,700 v1(205,725)
"ELRS RX": TP9.1 U3.42 | length 709.2
  Top Layer w10: TP9.1 655,1555 663.34,1563.34 706.66,1563.34 720,1550 720,1500 720,1203.33 731.67,1191.67 766.67,1191.67 829.84,1128.49 U3.42
"ELRS TX": TP10.1 U3.43 | length 602.4
  Top Layer w10: TP10.1 695,1500 695,1205 725,1175 760,1175 810.16,1124.84 U3.43
GND: C1.2 C2.2 C3.2 C4.2 C5.2 C6.2 C7.1 C8.2 C9.2 C10.2 C11.1 C12.2 C14.2 C15.2 C16.2 C25.2 D3.2 D4.2 J1.A1/B12 J1.A12/B1 P1.2 R1.1 R2.2 R3.2 R6.1 R7.1 R20.1 SW1.2 TP7.1 TP12.1 U1.2 U2.1 U3.8 U3.23 U3.35 U3.47 U3.49 U4.8 U4.9 U4.10 U4.11 U4.12 U4.13 U4.15 | length 1167.2
  Top Layer w10: C6.2 630.47,835.47 U3.8 790.47,835.47 U3.49 908.58,776.42 U3.23 908.58,710.25 905.4,707.06 888,689.67 888,680.47 868,660.47 868,650.47 867,649.47 854.53,637 836.69,637 ; U3.47 731.42,1012.52 745,1026.1 745,1065 ; U3.35 977.55,953.58 979.36,951.77 997.17,951.77 998.99,953.58 1019.76,953.58 C3.2
  Top Layer w20: C8.2 v1(520,795) v1(395,795) 380,810 380,960 v1(400,980) v1(515.16,980) C9.2
  other v1: 105,45 205,45 305,45 405,45 505,45 605,45 705,45 805,45 905,45 1005,45 1105,45 1205,45 1305,45 1405,45 1505,45 1605,45 1705,45 155,145 455,145 555,145 1255,145 1355,145 1655,145 1755,145 765,165 105,245 505,245 605,245 1705,245 895,335 155,345 1355,345 1655,345 1755,345 895,370 205,445 405,445 505,445 605,445 705,445 1705,445 1225,475 255,545 455,545 555,545 655,545 855,545 1655,545 1755,545 855,580 1105,645 1205,645 1305,645 1457.5,683 1255,745 1755,745 1308.5,753.5 745,780 815,780 885,780 457.5,795 595,829.65 205,845 1705,845 745,857.5 815,857.5 885,857.5 380,885 1306,892.5 745,935 815,935 885,935 155,945 255,945 355,945 1655,945 1755,945 1060,955 1467.5,974 457.58,980 1060,1000 650,1015 1230,1030 105,1045 205,1045 305,1045 405,1045 505,1045 1305,1045 1605,1045 775,1120 710,1140 155,1145 455,1145 655,1145 855,1145 955,1145 1055,1145 1755,1145 1285.5,1197 105,1245 205,1245 305,1245 605,1245 805,1245 1005,1245 1505,1245 1605,1245 1705,1245 155,1345 455,1345 655,1345 755,1345 855,1345 955,1345 1055,1345 1155,1345 1355,1345 1655,1345 1755,1345 105,1445 505,1445 805,1445 1005,1445 1105,1445 1205,1445 1305,1445 1705,1445 155,1545 455,1545 1355,1545 1655,1545 1755,1545
INT: U3.22 U4.6 | length 774.4
  Top Layer w10: v1(865,690) 888.9,713.9 U3.22 ; v1(1210,870) 1210,955 1265.75,1010.75 U4.6
  Bottom Layer w10: v1(865,690) 887,712 1055.47,712 1074.53,712 1210,847.47 v1(1210,870)
Lipo_V: C14.1 R5.1 R6.2 U3.18 | length 265.8
  Top Layer w10: R5.1@810.16,450.28 R5.1 ; U3.18 810.16,691.81 811.97,690
  Top Layer w20: R6.2 770.43,630.43 811.97,671.97 811.97,690
Net1_1: 1.1 C9.1 U3.5 | length 250.2
  Top Layer w10: 1.1 482.52,927.48 515,895 530,895 C9.1 560.47,894.53 U3.5
Net1_2: 1.2 C8.1 U3.6 | length 248.5
  Top Layer w10: 1.2 487.68,852.68 513.5,878.5 526.66,878.5 C8.1 559.69,874.84 U3.6
NetC11_2: C11.2 D2.1 L1.2
NetC13_1: C13.1 L1.1 U2.2
NetC13_2: C13.2 U2.6 | length 199.7
  Top Layer w10: U2.6 722.4,152.6 750,125 877.72,125 C13.2
NetC15_1: C15.1 U4.14 | length 61
  Top Layer w10: U4.14 1305.12,1308.46 C15.1
NetD1_1: D1.1 J1.A4/B9 J1.B4/A9 | length 181.4
  Top Layer w20: v1(1480,920) 1491.06,931.06 J1.B4/A9 ; v1@1485,746.02 J1.A4/B9
  Top Layer w25: 1473.98,735 1483.98,745 v1(1485,745)
  Top Layer w30: v1(1440,735) 1473.98,735 ; v1(1445,920) v1(1480,920)
  other v1: 1540,550 1585,550 1540,585 1585,585
NetD3_1: D3.1 R8.2 | length 46.2
  Top Layer w10: R8.2 1556.65,1145 D3.1
NetD4_1: D4.1 R10.2 | length 42.8
  Top Layer w10: R10.2 D4.1
NetJ1_A5: J1.A5 R1.2 | length 111.2
  Top Layer w10: R1.2 1418.07,769.65 J1.A5
NetJ1_B5: J1.B5 R2.1 | length 112
  Top Layer w10: R2.1 1419.96,887.76 J1.B5
NetR3_1: R3.1 R4.2 U2.4 | length 107.5
  Top Layer w10: R4.2 R3.1 699.45,220 U2.4
NetR7_2: R7.2 U3.44 | length 57.9
  Top Layer w10: R7.2 790.47,1036.81 U3.44
NetR8_1: R8.1 U3.19 | length 1013.6
  Top Layer w10: U3.19 829.84,702.54 833.47,698.91 833.47,671.53 v1(845,660) ; v1(1250,865) 1250,942.5 1317.21,1009.71 1385.92,1009.71 R8.1
  Bottom Layer w10: v1(845,660) 871.7,660 907.2,695.5 1110.5,695.5 1250,835 v1(1250,865)
NRST: C16.1 P1.3 R9.1 SW1.1 U3.7 | length 2009.9
  Top Layer w10: v1(237.48,1180.35) 236.93,1179.8 SW1.1 257.99,1098.94 R9.1 301.06,1100 C16.1 365,1095 365,1045 325,1005 325,790 343.3,771.7 551.7,771.7 572,792 572,842 585.16,855.16 U3.7
  Bottom Layer w10: v1(237.48,1180.35) 425.35,1180.35 585,1340 585,1450 695,1560 1010,1560 P1.3
"S1 ESC": TP4.1 U3.17 | length 776.6
  Top Layer w10: TP4.1 v1(140,595) ; v1(290,595) 290,600 313.5,623.5 723.5,623.5 790.47,690.47 U3.17
  Bottom Layer w10: v1(140,595) v1(290,595)
"S2 ESC": TP3.1 U3.16 | length 763.7
  Top Layer w10: TP3.1 205,555 290,640 708.5,640 770.79,702.29 U3.16
"S3 ESC": TP2.1 U3.29 | length 1371.3
  Top Layer w10: TP2.1 v1(140,515) ; v1(155,700) v1(605,700) ; U3.29 1045.47,835.47 v1(1065,855)
  Bottom Layer w10: v1(140,515) 130,525 105,550 105,675 130,700 v1(155,700) ; v1(605,700) 835,700 865,730 940,730 v1(1065,855)
"S4 ESC": TP1.1 U3.30 | length 1412.7
  Top Layer w10: TP1.1 v1(140,475) ; v1(245,725) 250,730 v1(640,730) ; U3.30 1020.16,855.16 v1(1025,860)
  Bottom Layer w10: v1(140,475) 88.5,526.5 88.5,738.5 105,755 130,755 215,755 v1(245,725) ; v1(640,730) 835,730 855,750 915,750 v1(1025,860)
SA0: U3.27 U4.4 | length 610.6
  Top Layer w10: U3.27 1038.9,796.1 v1@1059.78,775.22 ; v1(1175,875) 1175,1113.72 1200,1138.72 1200,1160 1214.88,1174.88 U4.4
  Bottom Layer w10: v1(1065,770) 1091.67,770 1175,853.33 v1(1175,875)
SCL: R21.2 U3.26 U4.2 | length 707.3
  Top Layer w10: U3.26 1018.58,776.42 v1(1025,770) ; v1(1130.03,940) 1115,955.03 1115,1179.78 1127.04,1191.83 1131.83,1191.83 1150.9,1191.83 R21.2 ; R21.2@1178.11,1212.68 1179.69,1214.25 U4.2
  Bottom Layer w10: v1(1025,770) 1052,797 1092,797 1152,857 1152,884.53 1160,892.53 1160,910.03 v1(1130.03,940)
SDA: R22.2 U3.28 U4.3 | length 580.9
  Top Layer w10: U3.28 955.83,815.5 1060.5,815.5 v1(1065,820) ; v1(1130,900) 1158.5,928.5 1158.5,1120.56 1175.43,1137.49 R22.2 1200,1194.57 U4.3
  Bottom Layer w10: v1(1065,820) 1080,820 1130,870 v1(1130,900)
SWCLK: P1.5 U3.37 | length 544.5
  Top Layer w10: P1.5 908,1462 908,1308.67 908,1122 928.27,1101.73 U3.37
SWDIO: P1.4 U3.34 | length 839.6
  Top Layer w10: P1.4 950,1510 924.86,1484.86 924.86,1315.14 924.86,1130.14 970,1085 1035,1085 1085,1035 1085,935 1068.11,918.11 996.81,918.11 981.02,933.9 U3.34
"USB D+": J1.A6 J1.B6 U3.33 | length 750.8
  Top Layer w10: U3.33 977.37,914.21 989.97,901.61 1076.72,901.61 1149.63,828.7 1585.18,828.7 ccw(c1585.18,837.91) 1594.39,837.91 ccw(c1583.92,837.91) 1583.92,848.39 J1.B6
"USB D-": J1.A7 J1.B7 U3.31 | length 814.8
  Top Layer w10: U3.31 979.84,874.84 990.11,885.11 1069.89,885.11 1145.98,809.02 J1.B7 1584.02,809.02 ccw(c1584.02,840) 1615,840 ccw(c1586.93,840) 1586.93,868.07 J1.A7
pads on no net: J1. J1.1 J1.2 J1.3 J1.4 J1.5 J1.6 J1.A8 J1.B8 U1.4 U2.5 U3.2 U3.3 U3.4 U3.10 U3.11 U3.14 U3.15 U3.20 U3.21 U3.25 U3.32 U3.38 U3.39 U3.40 U3.41 U3.45 U3.46 U4.7 U4.16

## Polygon pours and split planes (outlines as drawn)
NetC11_2 on Top Layer "NETC11_2_L01_P027" (solid, pour order 27): 930.79,300.5 930.79,261.5 1042,260.5 1040.5,299.5
GND on Top Layer "GND_L01_P025" (solid, remove dead copper, pour order 25): 38,1729 43,1724 1813,1724 1813,1704 1928,1589 1913,1574 1913,59 1903,59 1768,-76 48,-76 -117,89 -112,94 -112,1649
+5 on Top Layer "+5_L01_P023" (solid, remove dead copper, pour order 23): 1190,350 1295,350 1300,345 1300,235 1280,215 1205,215 1185,235 1185,345
+3.3 on Top Layer "+3.3_L01_P010" (solid, remove dead copper, pour order 10): 1216.62,1160.13 1216.84,1160.34 1243.82,1160.34 1243.82,1160.18 1244.58,1159.42 1244.58,1151.19 1237.71,1144.32 1237.71,1140.84 1222.94,1140.84 1222.89,1140.78 1222.84,1140.84 1222.84,1144.76 1216.57,1151.03
+3.3 on Top Layer "+3.3_L01_P020" (solid, remove dead copper, pour order 20): 925.34,743.04 933.32,743.04 936.92,739.41 936.92,718.08 955,700 955,540 940,525 940,475 960,455 1095,455 1105.21,444.79 1105.21,429.55 1098.45,422.79 907.21,422.79 885,445 885,620 923.65,658.65 923.65,741.34
Lipo_V on Top Layer "LIPO_V_L01_P016" (solid, remove dead copper, pour order 16): 821.81,457.43 824.17,455.08 824.17,439.17 820,435 765,435 760,440 760,495 761.67,496.67 778.33,496.67 780,495 780,465.39 788.27,457.43
"6S LIPO VBAT" on Top Layer "6S_LIPO_VBAT_L01_P015" (solid, remove dead copper, pour order 15): 840,420 835,425 795,425 785,415 785,220 790,215 835,215 840,220
NetC13_1 on Top Layer "NETC13_1_L01_P014" (solid, remove dead copper, pour order 14): 916.93,222.99 918.5,222.99 920,222.99 934.16,222.99 980.99,222.99 984.84,222.99 984.84,137.04 981.19,133.39 980.99,133.59 934.16,133.59 905.17,162.58 856.52,162.58 840.5,178.59 796.41,178.59 791.24,183.76 791.24,197.87 793.8,201.91 839.69,201.91 860.78,222.99
NetC11_2 on Top Layer "NETC11_2_L01_P013" (solid, remove dead copper, pour order 13): 1015,345 1020,350 1125,350 1130,345 1130,150 1115,135 1020,135 1015,140
+5 on Top Layer "+5_L01_P012" (solid, remove dead copper, pour order 12): 1315,500 1315,410 1330,395 1425,395 1445,415 1445,550 1435,560 1215,560 1180,525 1134.77,525 1128.25,518.54 1128.25,506.6 1135.05,499.8 1137.19,500
NetD1_1 on Top Layer "NETD1_1_L01_P011" (solid, remove dead copper, pour order 11): 1520,605 1600,605 1612.3,592.7 1612.3,447.3 1605,440 1511.97,440 1505,446.97 1505,590 1510,595
GND on Bottom Layer "GND_L02_P026" (solid, remove dead copper, pour order 26): -31,1756 1854,1756 1939,1671 1939,41 1809,-89 39,-89 -71,21 -71,1611
NetD1_1 on Bottom Layer "NETD1_1_L02_P018" (solid, remove dead copper, pour order 18): 1489.11,630.89 1501.1,618.9 1513,620 1600,620 1615,605 1615,540 1600,525 1415,525 1375,565 1375,915 1402,942 1489.11,942 1504.5,926.61 1504.5,725.57 1489.11,710.18
+5 on Bottom Layer "+5_L02_P024" (solid, remove dead copper, pour order 24): 1455,450 1170,450 1140,420 1140,240 1155,225 1295,225 1305,235 1305,370 1315,380 1460,380 1470,390 1470,440

## Other copper
Top Layer:
  pour cut-out: 762.06,1041.13 756.56,1035.63 756.56,1020.33 758.62,1018.26 760.95,1020.58 760.95,1021.05
  pour cut-out: 1510,1200 1507.6,1197.6 1507.6,1157.4 1515,1150 1520,1155 1525,1155 1525,1200
  pour cut-out: 594.37,1563.32 638.4,1563.32 640.87,1560.85 639.71,1559.69 639.71,1555 604.15,1555 594.37,1545.23
  pour cut-out: 1035,1110 1090,1110 1115,1135 1115,1100 1035,1100
  pour cut-out: 1377.63,881.63 1377.63,842.6 1380.23,840 1395,840 1395,875 1390,880
  pour cut-out: 850,310.31 920.39,310.31 915.08,305 850,305
  pour cut-out: 1132.52,359.45 1185.03,359.45 1185.03,359.29 1177.48,351.75 1177.02,352.21 1137.21,352.21
  pour cut-out: 972.25,314 995.5,314 1005.67,324.17
  pour cut-out: 932,759.72 932,935.01 943.74,935.01 943.74,759.66
  pour cut-out: 752.97,987.27 928.27,987.27 928.27,977.11 752.92,977.11
  pour cut-out: 708.47,973.27 708.47,861.46 699.52,861.46 699.52,973.31
  pour cut-out: 708.24,815.79 708.25,756.73 700,756.73 700,815.83
  pour cut-out: 711.73,753.25 881.75,753.25 890,745 710,745
  pour cut-out: 1123.2,798.2 1073,748 989.05,748 979.79,757.26 982.97,760.43 982.97,761.12 1046.12,761.12 1077.46,792.46 1077.46,801.35 1083.65,807.54 1127.54,807.54 1130,810 1135.17,798.2
  pour cut-out: 1040.39,1039.28 1041.11,1040 1070,1040 1070,1028.37 1073.37,1025 1045,1025 1040,1020
  pour cut-out: 1190,1005 1240,1005 1240,1000 1190,1000
  pour cut-out: 1212.65,1086.35 1209,1090 1190,1090 1190,1085 1191.35,1086.35
Bottom Layer:
  pour cut-out: 850,1500 1060,1500 1060,1479.8 854.58,1479.8
  pour cut-out: 1097.83,1151.12 1100,1148.95 1100,1080 1115,1080 1115,1155
  pour cut-out: 1214,1189 1214,1157.5 1205.5,1157.5 1208,1160 1208.25,1193.25 1258.5,1243.5 1318.5,1243.5 1323.5,1238.5 1263.5,1238.5
  pour cut-out: 653.49,815.98 653.49,751.51 665,740 640,740 640,810

## Silkscreen, mask and mechanical layers (free items; w line width, h text height)
Mechanical 1:
  circle w10: c295.28,236.22 r120.08
  circle w10: c295.28,1437.01 r120.08
  circle w10: c1496.06,236.22 r120.08
  circle w10: c1496.06,1437.01 r120.08
  lines w10: 0,118.11 ccw(c118.11,118.11) 118.11,0 1673.23,0 ccw(c1673.23,118.11) 1791.34,118.11 1791.34,1555.12 ccw(c1673.23,1555.12) 1673.23,1673.23 118.11,1673.23 ccw(c118.11,1555.12) 0,1555.12 0,118.11